# Altium PCB STM32_CAN_Telemetry_Node.PcbDoc
Units mm, origin at the board's own origin, x right, y up, seen from the top; angles counter-clockwise.
Board outline 90 x 67 mm, 2 copper layers (Top Layer, Bottom Layer); 72 components, 39 nets, 216 pads, 56 vias.
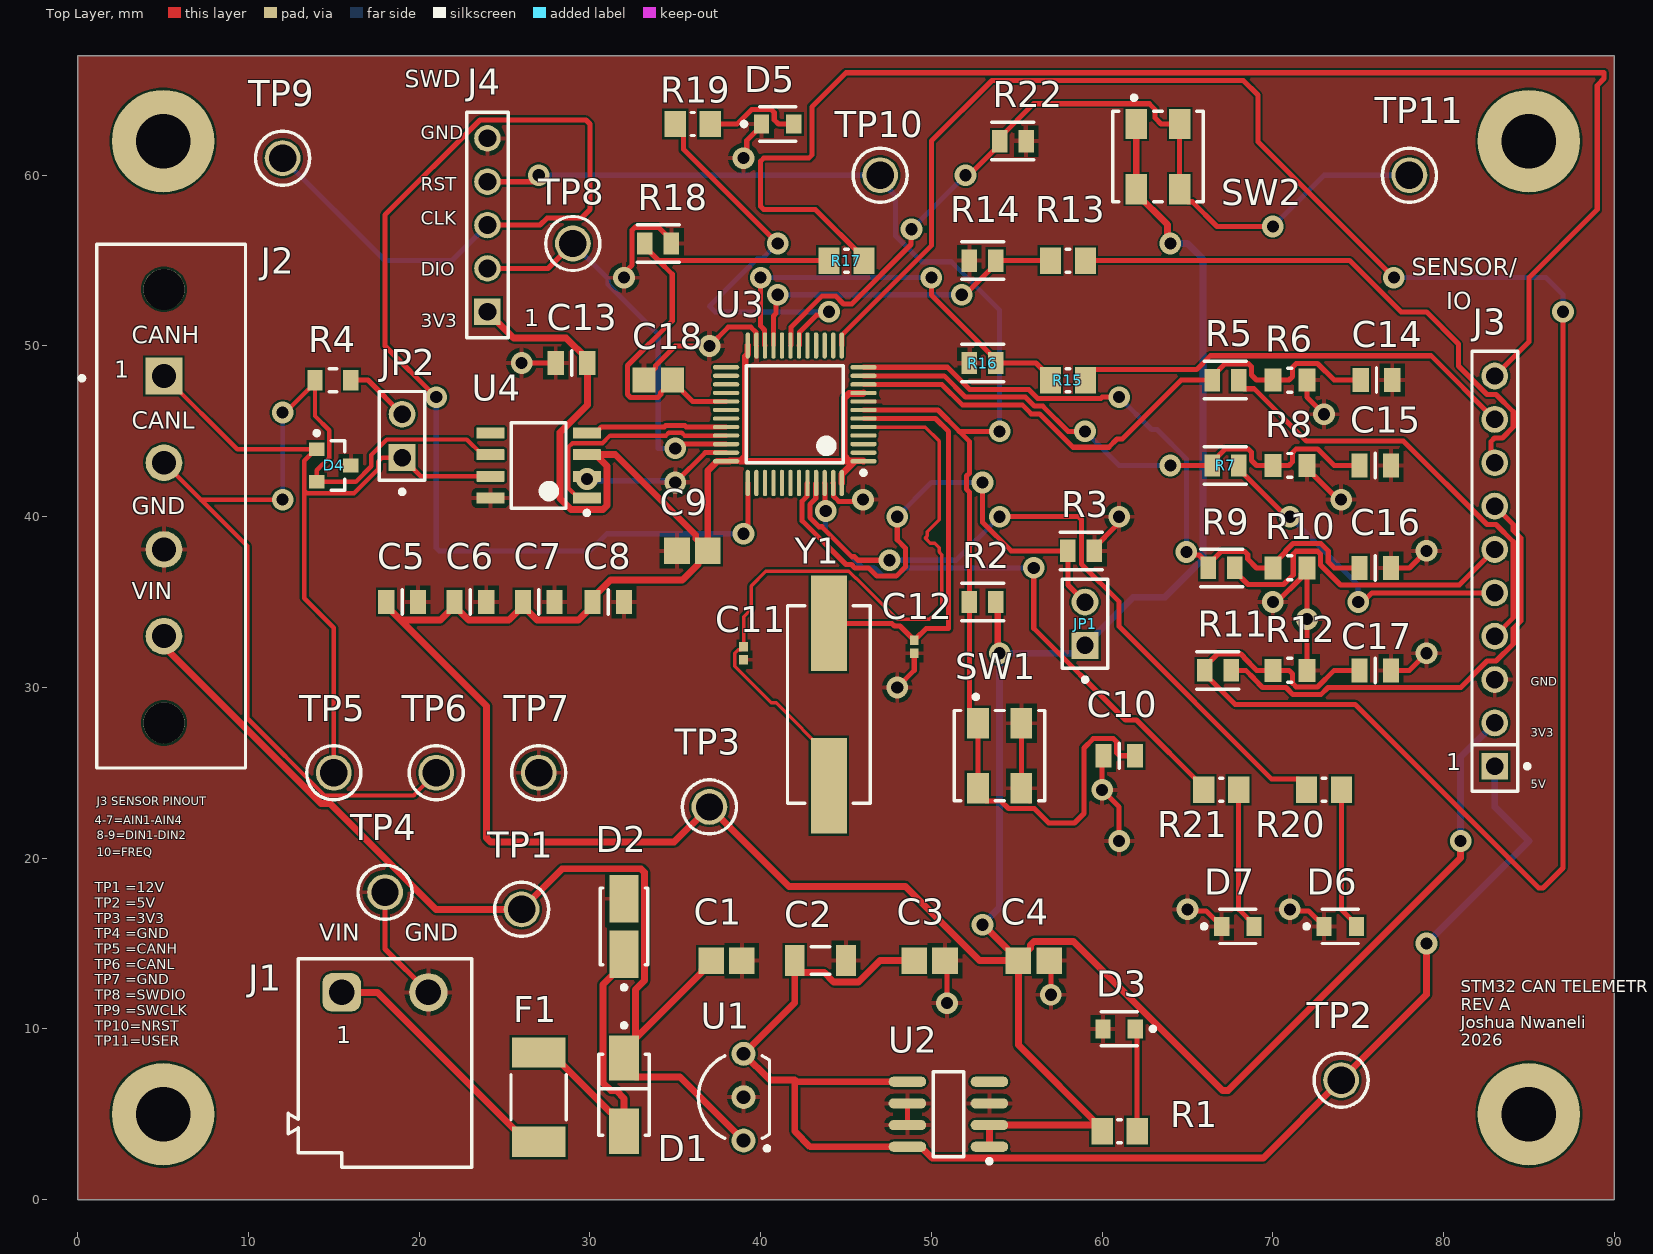
[diagram p0: Top Layer view]
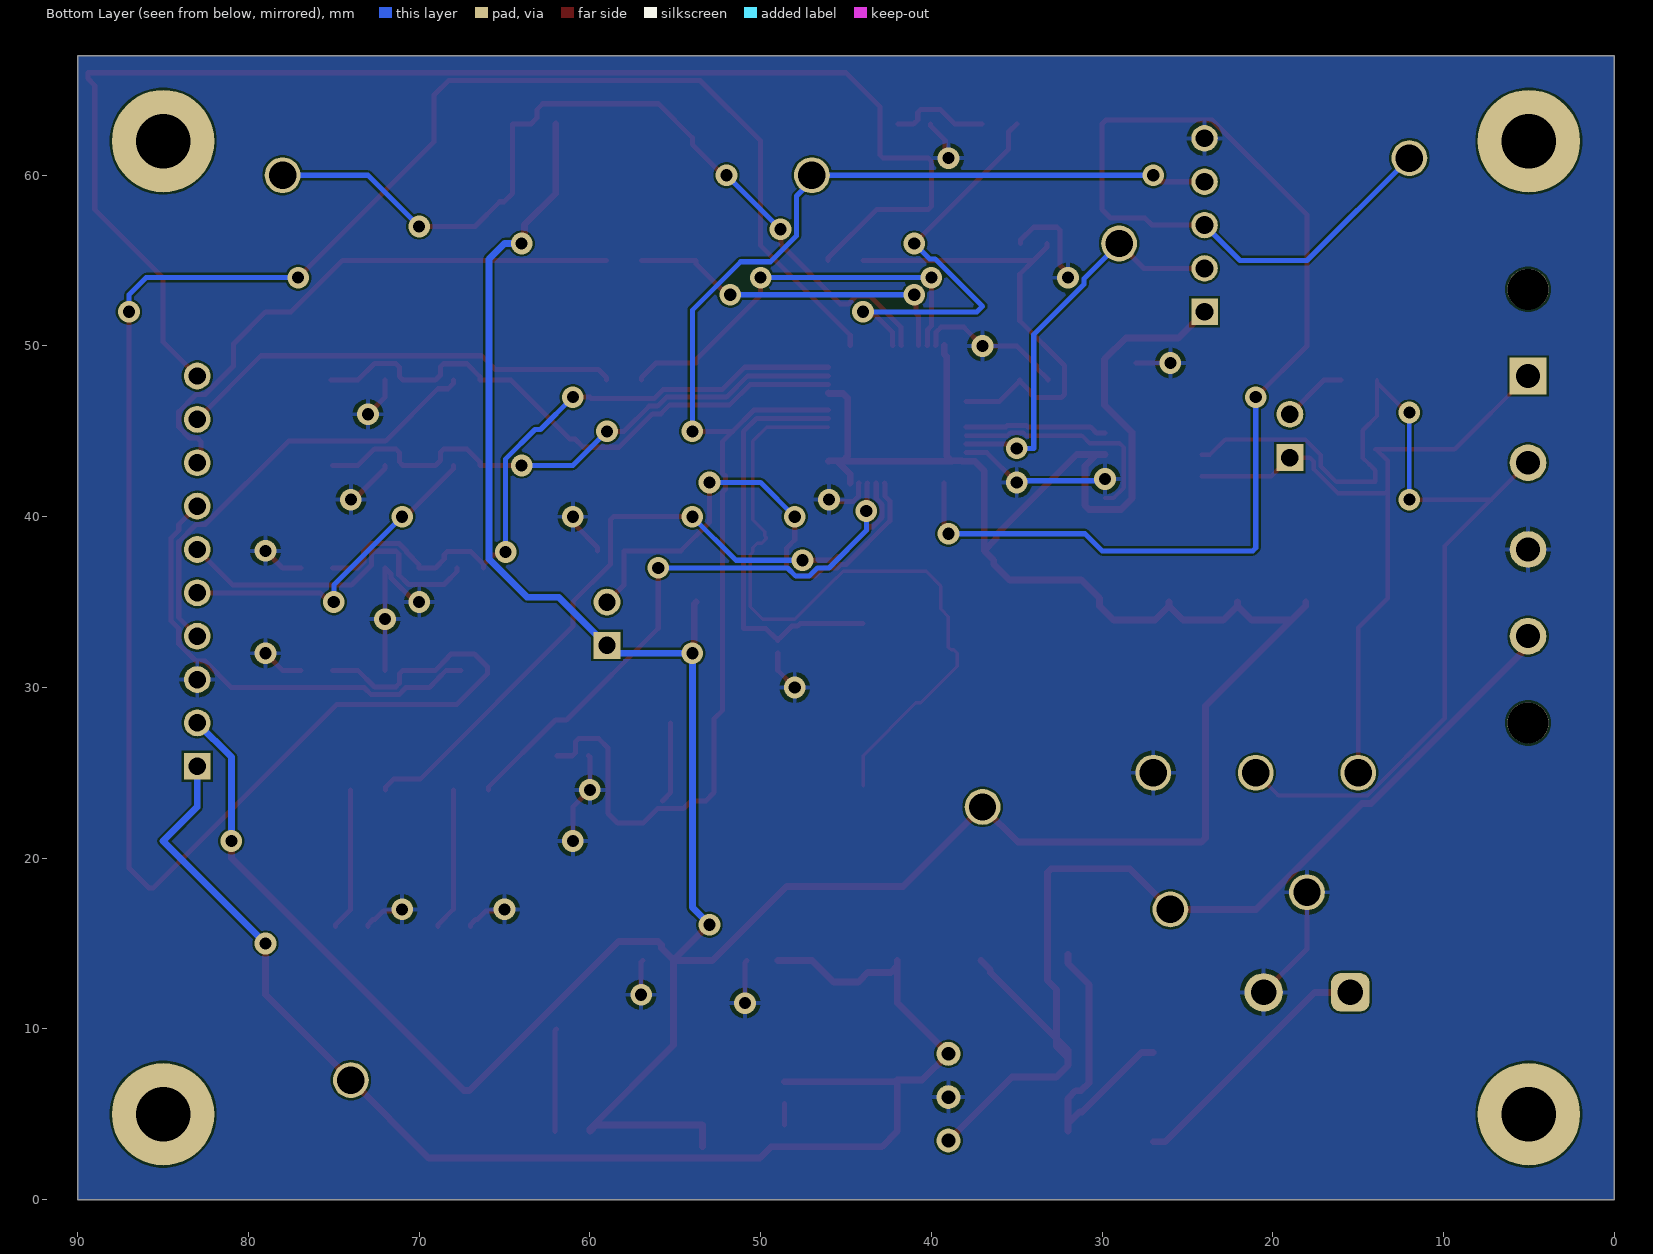
[diagram p1: Bottom Layer view, seen from below]
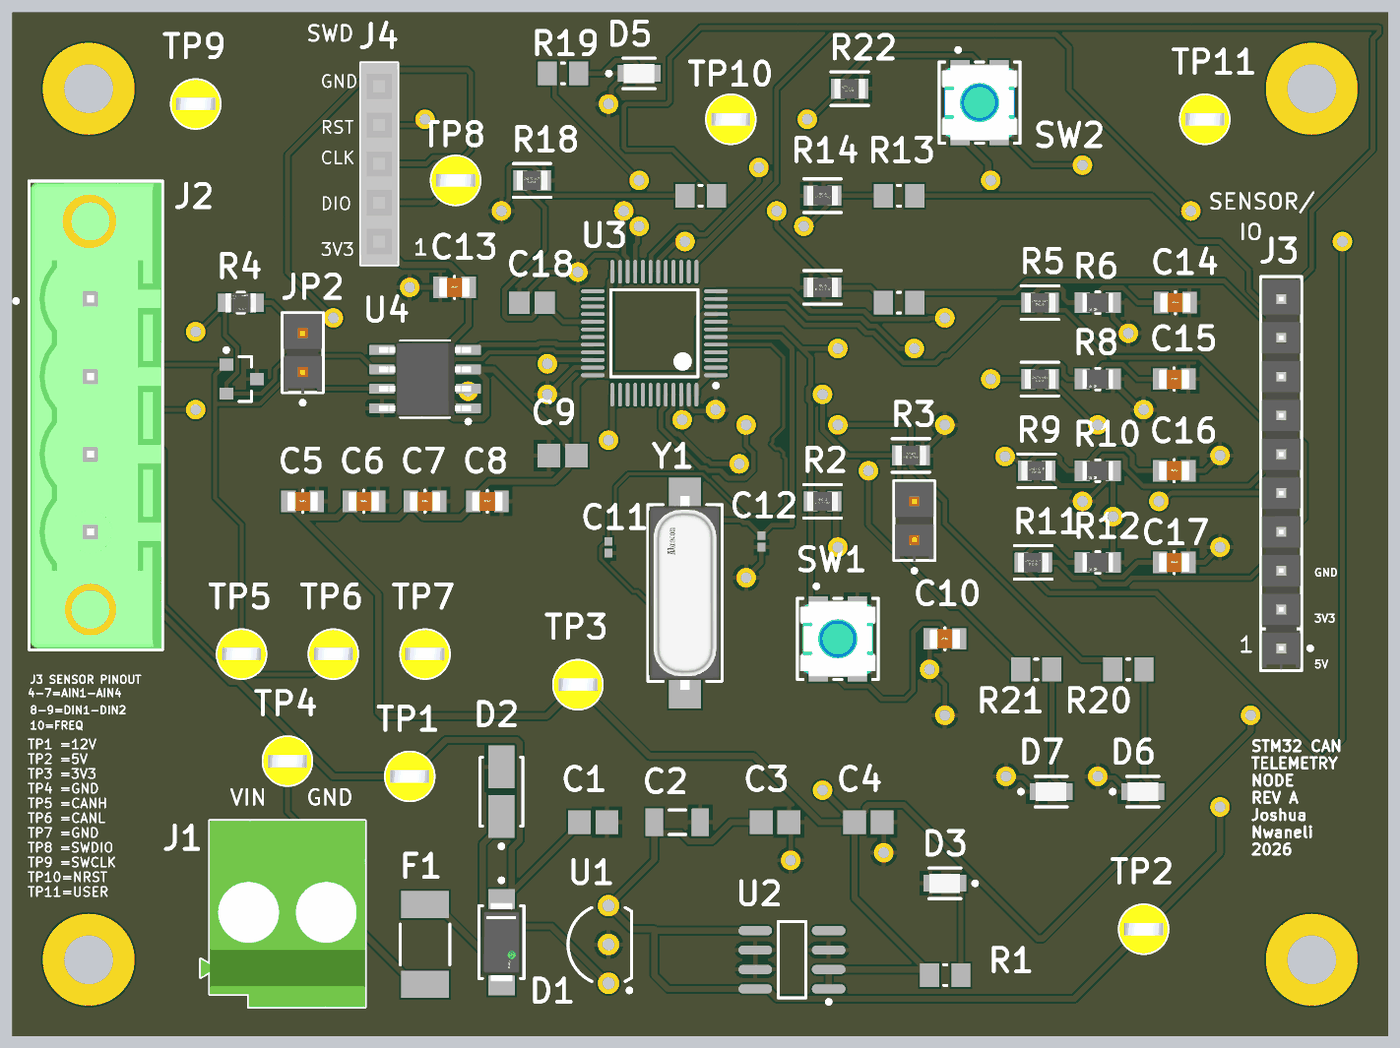
[diagram p2: 3D render of the assembled board from above, using the file's embedded part models]

## Layer stack, top to bottom
Top Solder: solder mask 0.0102, Solder Resist, Dk 3.5
Top Layer: signal copper 0.0356
Dielectric 1: dielectric 0.32, FR-4, Dk 4.8
Bottom Layer: signal copper 0.0356
Bottom Solder: solder mask 0.0102, Solder Resist, Dk 3.5

## Board outline
0,0 90,0 90,67 0,67

## Design rules (kind name [scope] priority, off if disabled: settings)
Clearance [All] p1: gap=0.125 ignorepadtopadclearanceinfootprint=FALSE
Height [All] p1: minheight=0 maxheight=40 prefheight=12.7
HoleSize [All] p1: absolutevalues=TRUE maxlimit=3.5 minlimit=0.025 maxpercent=80.000 minpercent=20.000
MinimumSolderMaskSliver [All] p1: minsoldermaskwidth=0.15
PolygonConnect [All] p1: connectstyle=Relief reliefconductorwidth=0.254 reliefentries=4 polygonreliefangle="90 Angle" airgapwidth=0.254
RoutingVias [All] p1: holewidth=0.711 width=1.27 viastyle="Through Hole" minholewidth=0.711 minwidth=1.27 maxholewidth=0.711 maxwidth=1.27
SilkToSolderMaskClearance [IsPad] p1: minsilkscreentomaskgap=0.15 clearancetoexposedcopper=TRUE
SolderMaskExpansion [All] p1: expansion=0 istentingtop=FALSE
SupplyNets "Schematic Supply Nets_3" [InNet('+3V3')] p1: voltage=0.000
SupplyNets "Schematic Supply Nets_2" [InNet('VIN_12V')] p2: voltage=0.000
SupplyNets "Schematic Supply Nets_1" [InNet('+5V')] p3: voltage=0.000
SupplyNets "Schematic Supply Nets" [InNet('GND')] p4: voltage=0.000
Width Width_Power [InNet('VIN_RAW') Or InNet('VIN_FUSED') Or InNet('VIN_12V') Or InNet('+5V') Or InNet('+3V3')] p1: maxlimit=0.8 minlimit=0.4 preferedwidth=0.6 minimp=50.000000 maximp=50.000000 favimp=50.000000 // Wider traces for power rails
Width [All] p2: maxlimit=0.3 minlimit=0.15 preferedwidth=0.2 minimp=50.000000 maximp=50.000000 favimp=50.000000
26 further rules are at their usual default settings.

## Components (designator, comment, footprint, x,y, rotation, side; value= is the part's Value field where it differs from the comment)
C1 "10uF" CAPC2013X140X50ML20T25 38,14 r180 top
C2 "22uF" CAPC1206(3216)190_N 43.5,14 r0 top
C3 "10uF" CAPC2013X140X50ML20T25 49.9,14 r180 top
C4 "10uF" CAPC2013X140X50ML20T25 56,14 r180 top
C5 "0.1uF" FP-CC0805-EB-MFG 19,35 r0 top
C6 "0.1uF" FP-CC0805-EB-MFG 23,35 r0 top
C7 "0.1uF" FP-CC0805-EB-MFG 27,35 r0 top
C8 "0.1uF" FP-CC0805-EB-MFG 31.075,35 r0 top
C9 "10uF" CAPC2013X140X50ML20T25 36,38 r0 top
C10 "0.1uF" FP-CC0805-EB-MFG 61,26 r0 top
C11 "27pF" CAPC0603X33X15ML03T05 39,32 r90 top
C12 "27pF" CAPC0603X33X15ML03T05 49,32.38 r90 top
C13 "0.1uF" FP-CC0805-EB-MFG 28.925,49 r0 top
C14 "0.1uF" FP-CC0805-EB-MFG 76.075,48 r0 top
C15 "0.1uF" FP-CC0805-EB-MFG 76,43 r0 top
C16 "0.1uF" FP-CC0805-EB-MFG 76,37 r0 top
C17 "0.1uF" FP-CC0805-EB-MFG 76,31 r0 top
C18 "1nF" CAPC2013X127X50NL20T25 34,48 r180 top
D1 "SS14 Schottky" FP-403AE-MFG 32,6.15 r90 top
D2 "SMAJ18A TVS" VISH-DO-214AC-2_M 32,16 r90 top
D3 "Power LED" FP-SML-LXT0805IW-TR-MFG 61,10 r180 top
D4 "CAN TVS Diode" ONSC-SOT-23-3-318-08_V 15,43 r0 top
D5 "Status LED" FP-SML-LXT0805IW-TR-MFG 41,63 r0 top
D6 "CAN Activity LED" FP-SML-LXT0805IW-TR-MFG 73.95,16 r0 top
D7 "Error LED" FP-SML-LXT0805IW-TR-MFG 67.95,16 r0 top
F1 "0.5A PTC Fuse" LFUS-1812L05030PR_V 27,6 r90 top
J1 "12V_INPUT" 691249510002 18,8 r0 top
J2 "CAN Connector" FP-1777099-MFG 5.466,40.62 r90 top
J3 "Sensor Header" FP-TSW-110-07-T-S-MFG 83,36.81 r90 top
J4 "SWD Header" SMTC-SSW-105-01-X-S 24,52 r90 top
JP1 "BOOT0 Jumper" FP-TSW-102-12-T-S-MFG 59,33.73 r90 top
JP2 "CAN TERM ENABLE" FP-TSW-102-12-T-S-MFG 19,44.73 r90 top
R1 "1K" RESC2013X50X30ML20T20 61.025,4 r0 top
R2 "10K" FP-CRGP0805-IPC_C 53,35 r0 top value=10KΩ
R3 "10K" FP-CRGP0805-IPC_C 58.776,38 r0 top value=10KΩ
R4 "120" FP-RT0805-MFG 14.95,48 r0 top value=120Ω
R5 "10K" FP-CRGP0805-IPC_C 67.224,48 r180 top value=10KΩ
R6 "20K" FP-RN732A-MFG 71,48 r180 top value=20KΩ
R7 "10K" FP-CRGP0805-IPC_C 67.224,43 r180 top value=10KΩ
R8 "20K" FP-RN732A-MFG 71,43 r180 top value=20KΩ
R9 "10K" FP-CRGP0805-IPC_C 67,37 r180 top value=10KΩ
R10 "20K" FP-RN732A-MFG 71,37 r180 top value=20KΩ
R11 "10K" FP-CRGP0805-IPC_C 66.776,31 r180 top value=10KΩ
R12 "20K" FP-RN732A-MFG 71,31 r180 top value=20KΩ
R13 "1K" RESC2013X50X30ML20T20 58,55 r180 top
R14 "10K" FP-CRGP0805-IPC_C 53,55 r0 top value=10KΩ
R15 "1K" RESC2013X50X30ML20T20 58,48 r180 top
R16 "10K" FP-CRGP0805-IPC_C 53,49 r0 top value=10KΩ
R17 "1K" RESC2013X50X30ML20T20 45.025,55 r180 top
R18 "10K" FP-CRGP0805-IPC_C 34,56 r180 top value=10KΩ
R19 "1K" RESC2013X50X30ML20T20 36.025,63 r0 top
R20 "1K" RESC2013X50X30ML20T20 73,24 r0 top
R21 "1K" RESC2013X50X30ML20T20 66.975,24 r0 top
R22 "10K" FP-CRGP0805-IPC_C 54.776,62 r180 top value=10KΩ
SW1 "RESET" FP-7914J-1-032-MFG 54,26 r0 top
SW2 "USER BUTTON" FP-7914J-1-032-MFG 63.27,61.095 r0 top
TP1 "12V" KSTN-5014_V 26,17 r0 top
TP2 "5V" KSTN-5014_V 74,7 r0 top
TP3 "3.3V" KSTN-5014_V 37,23 r0 top
TP4 "GND" KSTN-5014_V 18,18 r0 top
TP5 "CANH Test Point" KSTN-5014_V 15,25 r0 top
TP6 "CANL Test Point" KSTN-5014_V 21,25 r0 top
TP7 "GND Test Point" KSTN-5014_V 27,25 r0 top
TP8 "SWDIO Test Point" KSTN-5014_V 29,56 r0 top
TP9 "SWCLK Test Point" KSTN-5014_V 12,61 r0 top
TP10 "NRST Test Point" KSTN-5014_V 47,60 r0 top
TP11 "USER_BUTTON Test Point" KSTN-5014_V 78,60 r0 top
U1 "5V Regulator" LP3 39,6 r0 top
U2 "3.3V LDO" LT-S8-8_N 51,5 r180 top
U3 "STM32F103C8T6" STM-LQFP48_L 42,46 r180 top
U4 "CAN Transceiver" D0008A_M 27,43 r180 top
Y1 "8MHz Crystal" FP-ABLS-MFG 44,29 r90 top

## Footprints (in the part's own frame and the unit in brackets; to place one, negate y for a bottom-side part, rotate by r counter-clockwise, add the part's x,y. Pads: shape width x height; smd on the part's side, far side on the other; paste and mask are expansions set on the pad)
691249510002 [mm] "5.08mm Horizontal Cable Entry with Rising Cage Clamp, 02p"
  rrect50% 2.25x2.25 hole 1.5: 1(-2.54,4.14)
  round 2.25 hole 1.5: 2(2.54,4.14)
  silkscreen extent -5.68,-6.1 5.08,6.1, body extent -5.68,-6.1 5.08,6.1, height 31.6
CAPC0603X33X15ML03T05 [mm] "Chip Capacitor, 2-Leads, Body 0.60x0.30mm, IPC Low Density"
  rect 0.56x0.52 smd: 1(-0.38,0) 2(0.38,0)
  body extent -0.31,-0.17 0.32,0.16, height 0.33
CAPC1206(3216)190_N [mm] "Chip Capacitor, Body 3.2x1.6mm, Height 1.9mm, IPC Medium Density"
  rect 1.15x1.8 smd: 1(-1.5,0) 2(1.5,0)
  silkscreen extent -0.55,-0.8 0.55,0.8, body extent -1.7,-0.9 1.7,0.9, height 1.9
CAPC2013X127X50NL20T25 [mm] "Chip Capacitor, 2-Leads, Body 2.01x1.25mm, IPC Medium Density"
  rect 1.35x1.45 smd: 1(-0.825,0) 2(0.825,0)
  body extent -1.1,-0.72 1.11,0.72, height 1.27
CAPC2013X140X50ML20T25 [mm] "Chip Capacitor, 2-Leads, Body 2.00x1.25mm, IPC Low Density"
  rect 1.5x1.55 smd: 1(-0.9,0) 2(0.9,0)
  body extent -1.1,-0.72 1.1,0.72, height 1.4
D0008A_M [mm] "SOIC, 8-Leads, Body 5x4mm, Pitch 1.27mm, IPC Low Density"
  rrect15% 1.65x0.65 smd: 1(-2.825,1.905) 2(-2.825,0.635) 3(-2.825,-0.635) 4(-2.825,-1.905) 5(2.825,-1.905) 6(2.825,-0.635) 7(2.825,0.635) 8(2.825,1.905)
  silkscreen extent -2.95,-2.5 1.6,2.9, body extent -3,-2.45 3,2.45, height 1.63
FP-403AE-MFG [mm]
  rect 2.65x1.75 smd paste+0 mask+0: 1(-2.15,0) 2(2.15,0)
  silkscreen extent -2.37,-1.48 4.17,1.48, body extent -3.57,-1.58 3.57,1.58, height 0.25
FP-7914J-1-032-MFG [mm]
  rect 1.27x1.78 smd paste+0 mask+0: 1_1-(-1.27,1.905) 1_2+(1.27,1.905) 2_1-(-1.27,-1.905) 2_2+(1.27,-1.905)
  silkscreen extent -2.65,-2.65 2.65,3.57, body extent -2.75,-2.9 2.75,2.9, height 0.25
FP-1777099-MFG [mm]
  rect 2.15x2.15 hole 1.4 paste-2539.97 mask+0: 1(7.62,0.415)
  round 2.15 hole 1.4 paste-2539.97 mask+0: 2(2.54,0.415) 3(-2.54,0.415) 4(-7.62,0.415)
  round 2.4 hole 2.4 unplated paste-2539.97 mask+0: ""(-12.7,0.415) ""(12.7,0.415)
  silkscreen extent -15.34,-4.36 15.34,5.34, body extent -15.44,-4.46 15.44,4.46, height 0.25
FP-ABLS-MFG [mm]
  rect 5.6x2.1 smd paste+0 mask+0: 1(-4.75,0) 2(4.75,0)
  silkscreen extent -5.77,-2.42 5.77,2.42, body extent -7.65,-2.52 7.65,2.52, height 0.25
FP-CC0805-EB-MFG [mm]
  rect 0.95x1.4 smd paste+0 mask+0: 1(-0.925,0) 2(0.925,0)
  silkscreen extent 0,-0.72 0,0.72, body extent -1.6,-1.05 1.6,1.05, height 0.25
FP-CRGP0805-IPC_C [mm]
  rect 0.906x1.31 smd paste+0 mask+0: 1(-0.776,0) 2(0.776,0)
  silkscreen extent -1.23,-1.1 1.23,1.1, body extent -1.33,-0.8 1.33,0.8, height 0.25
FP-RN732A-MFG [mm]
  rect 1x1.35 smd paste+0 mask+0: 1(-1,0) 2(1,0)
  silkscreen extent -0.13,-0.7 0.13,0.7, body extent -1.6,-0.8 1.6,0.8, height 0.25
FP-RT0805-MFG [mm]
  rect 0.9x1.2 smd paste+0 mask+0: 1(-1.05,0) 2(1.05,0)
  silkscreen extent -0.23,-0.67 0.23,0.67, body extent -1.6,-0.77 1.6,0.77, height 0.25
FP-SML-LXT0805IW-TR-MFG [mm]
  rect 0.9x1.1 smd paste+0 mask+0: 1(-0.95,0) 2(0.95,0)
  silkscreen extent -2.1,-1 1.05,1, body extent -1.5,-0.8 1.5,0.8, height 0.25
FP-TSW-102-12-T-S-MFG [mm]
  rect 1.57x1.57 hole 1.02 paste-2539.97 mask+0: 1(-1.27,0)
  round 1.57 hole 1.02 paste-2539.97 mask+0: 2(1.27,0)
  silkscreen extent -3.4,-1.34 2.61,1.34, body extent -2.71,-1.44 2.71,1.44, height 0.25
FP-TSW-110-07-T-S-MFG [mm]
  rect 1.57x1.57 hole 1.02: 1(-11.43,0)
  round 1.57 hole 1.02: 2(-8.89,0) 3(-6.35,0) 4(-3.81,0) 5(-1.27,0) 6(1.27,0) 7(3.81,0) 8(6.35,0) 9(8.89,0) 10(11.43,0)
  silkscreen extent -12.89,-2.02 12.89,1.34, body extent -12.99,-1.44 12.99,1.44, height 0.25
KSTN-5014_V [mm] "Test Point, Dia 3.17mm"
  round 2.1 hole 1.6: 1(0,0)
  silkscreen extent -1.59,-1.58 1.59,1.58, body extent -1.59,-1.59 1.59,1.59, height 8.13
LFUS-1812L05030PR_V [mm] "SMD, 2-Leads, Body 4.55x3.24mm"
  rect 1.78x3.15 smd: 1(-2.615,0) 2(2.615,0)
  silkscreen extent -1.33,-1.62 1.33,1.62, body extent -2.27,-1.62 2.27,1.62, height 1
LP3 [mm] "TO, Flat Index; 3 In-Line, Formed Axial Leads; Body Dia. 4.8mm; Leads 0.56 x 0.41 mm (max)"
  round 1.4 hole 0.8: 1(0,-2.54) 2(0,0) 3(0,2.54)
  silkscreen extent -2.65,-3.13 1.52,2.41, body extent -2.65,-2.66 1.52,2.66, height 9.33
LT-S8-8_N [mm] "SOIC, 8-Leads, Body 4.9x3.9mm, Pitch 1.27mm, IPC Medium Density"
  oval 2.2x0.6 smd: 1(-2.4,1.905) 2(-2.4,0.635) 3(-2.4,-0.635) 4(-2.4,-1.905) 5(2.4,-1.905) 6(2.4,-0.635) 7(2.4,0.635) 8(2.4,1.905)
  silkscreen extent -2.53,-2.5 0.9,2.88, body extent -2,-2.5 2,2.5, height 1.76
ONSC-SOT-23-3-318-08_V [mm] "SOT23, 3-Leads, Body 2.92x1.3mm, Pitch 0.95mm"
  rect 0.9x0.8 smd: 1(-1,0.95) 2(-1,-0.95) 3(1,0)
  silkscreen extent -1.12,-1.46 0.65,2.02, body extent -0.65,-1.46 0.65,1.46, height 1.11
RESC2013X50X30ML20T20 [mm] "Chip Resistor, 2-Leads, Body 2.00x1.25mm, IPC Low Density"
  rect 1.25x1.55 smd: 1(-1.025,0) 2(1.025,0)
  silkscreen extent -0.1,-0.67 0.1,0.67, body extent -1.1,-0.72 1.1,0.72, height 0.5
SMTC-SSW-105-01-X-S [mm] "SQ Post Socket, 1x5 Pins, Vertical, 2.54mm Pitch, Female"
  rect 1.55x1.55 hole 1.04: 1(0,0)
  round 1.55 hole 1.04: 2(2.54,0) 3(5.08,0) 4(7.62,0) 5(10.16,0)
  silkscreen extent -1.53,-1.2 11.69,1.2, body extent -1.52,-1.21 11.68,1.21, height 8.51
STM-LQFP48_L [mm] "QFP, 48-Leads, Body 7x7mm, Pitch 0.5mm, IPC High Density"
  oval 1.55x0.25 smd: 1(-4.025,2.75) 2(-4.025,2.25) 3(-4.025,1.75) 4(-4.025,1.25) 5(-4.025,0.75) 6(-4.025,0.25) 7(-4.025,-0.25) 8(-4.025,-0.75) 9(-4.025,-1.25) 10(-4.025,-1.75) 11(-4.025,-2.25) 12(-4.025,-2.75) 25(4.025,-2.75) 26(4.025,-2.25) 27(4.025,-1.75) 28(4.025,-1.25) 29(4.025,-0.75) 30(4.025,-0.25) 31(4.025,0.25) 32(4.025,0.75) 33(4.025,1.25) 34(4.025,1.75) 35(4.025,2.25) 36(4.025,2.75)
  oval 0.25x1.55 smd: 13(-2.75,-4.025) 14(-2.25,-4.025) 15(-1.75,-4.025) 16(-1.25,-4.025) 17(-0.75,-4.025) 18(-0.25,-4.025) 19(0.25,-4.025) 20(0.75,-4.025) 21(1.25,-4.025) 22(1.75,-4.025) 23(2.25,-4.025) 24(2.75,-4.025) 37(2.75,4.025) 38(2.25,4.025) 39(1.75,4.025) 40(1.25,4.025) 41(0.75,4.025) 42(0.25,4.025) 43(-0.25,4.025) 44(-0.75,4.025) 45(-1.25,4.025) 46(-1.75,4.025) 47(-2.25,4.025) 48(-2.75,4.025)
  silkscreen extent -4.15,-2.85 2.85,3.55, body extent -3.5,-3.5 3.5,3.5, height 1.6
VISH-DO-214AC-2_M [mm] "DO-214AC, 2-Leads, Body 4.5x2.79mm, IPC Low Density"
  rect 2.8x1.7 smd: 1(-1.625,0) 2(1.625,0)
  silkscreen extent -3.7,-1.4 2.25,1.4, body extent -2.25,-1.39 2.25,1.4, height 2.29

## Part data
C1 C3 C4 C9: library part CMP-2007-04702-1, Manufacturer="AVX Interconnect / Elco", Part Number=0805ZC106KAT2A
C2: library part CMP-1037-04990-1, "CAP 22uF 10V ±20% 1206 (3216 Metric) Thickness 1.9mm SMD", Case-EIA=1206, Case-Metric=3216, Rated Voltage="10 V", Tolerance=Â±20%, Max Thickness="1.9 mm", Technology=SMT
C5 C6 C7 C8 C10 C13 C14 C15 C16 C17: library part CMP-00621-107850848-1, "CC0805KKX7RYBB104 Capacitor Ceramic 0.01uF 250V X7R 10% 0805 T/R", Capacitance=100nF, Case/Package=0805, Max Operating Temperature=125°C, Min Operating Temperature=-55°C, Tolerance=10%, Voltage Rating=250V, Height=1.45mm, Material=Ceramic, NexarPartId=107850848
C11 C12: library part CMP-2010-00173-1, Manufacturer="AVX Interconnect / Elco", Part Number=0201YA270JAT2A
C18: library part CMP-2007-04833-1, Manufacturer="AVX Interconnect / Elco", Part Number=08052C102MAT2A
D1: library part CMP-2000-04943-2, "DIODE SCHOTTKY 40V 1A SMA", Forward Current=1A, Manufacturer="ON Semiconductor", Manufacturer Part Number=SS14, Max Junction Temp=+125°C, Max Repetitive Reverse Voltage=40V, Max Surge Forward Current=40A, Package=403AE, Peak Reverse Current=0.2mA, Temperature="-65°C to +125°C", Temperature Range Low=-65°C, Automotive=No, Category=Diode, ComponentLink2Description=Datasheet, ComponentLink2URL=https://www.onsemi.com/pub/Collateral/SS19-D.PDF, Device Class L1="Discrete Semiconductors", Device Class L2=Diodes, Device Class L3="Schottky Diodes", Digikey Description="DIODE SCHOTTKY 40V 1A SMA", Height=2.5mm, Lead Free=Yes, Mouser Description="Schottky Diodes & Rectifiers SMA 40V 1.0A", Octopart=https://octopart.com/ss14-on+semiconductor-29205033, RoHS=TRUE, Standoff Height=0.05mm, Temperature Range High=+125°C
D2: library part CMP-0548-00222-2, "Transient Voltage Suppressor, 6.40 to 231 V, 18 V Stand-off Voltage, Uni-Directional, -55 to 155 degC, 2-pin DO-214AC, Pb-Free, Tape and Reel", Manufacturer="Vishay Semiconductor", Operating Junction and Storage Temperature Range="-55 to 150 degC", PartNumber=SMAJ18A-E3/61, ComponentLink1Description="Manufacturer URL", ComponentLink1URL=http://www.vishay.com/, ComponentLink2Description=Datasheet, ComponentLink2URL=http://www.vishay.com/docs/88390/smaj50a.pdf, ComponentLink3Description="Package Specification", ComponentLink3URL=http://www.vishay.com/docs/88390/smaj50a.pdf, DatasheetVersion=12/8/2013, ID (uA)=1, IFSM="40 A", Mounting Technology="Surface Mount", PackageDescription="2-Pin DO-214AC (SMA), Body 4.245 x 2.665 mm", PackageReference=DO-214AC-2, Packing="Tape and Reel", PPPM (W)="400, 300", RoHS=TRUE, VBR Uni-Directional (V)="6.4 to 231", VWM (V)=18
D3 D5 D6 D7: library part CMP-1724-00002-2, "LED RED DIFFUSED SMD", Case Code (Imperial)=0805, Case Code (Metric)=2012, Color=Red, Forward Current=20mA, Forward Voltage=2V, Lens Color=White, Max Operating Temperature=80°C, Min Operating Temperature=-25°C, Package Quantity=1, Approvals=UL, Case/Package=0805, Dominant Wavelength=635nm, Height=0.8mm, Illumination Color=Red, Lead Free="Lead Free", Length=2mm, Lens Style=Rectangular, Lens Transparency=Diffused, Luminous Intensity=11mcd, Mount="Surface Mount", Number of LEDs=1, Number of Pins=2, Packaging="Tape and Reel", REACH SVHC="No SVHC", Test Current=20mA, Viewing Angle=140°, Wavelength=635nm, Width=1.25mm
D4: library part CMP-1063-00169-1, "Dual-line ESD/transient protection for CANH and CANL", Manufacturer="On Semiconductor", PartNumber=SZNUP2105LT3G, C Max (pF)=30, ComponentLink1Description="Manufacturer URL", ComponentLink1URL=http://www.onsemi.com/, ComponentLink2Description=Datasheet, ComponentLink2URL=http://www.onsemi.cn/pub_link/Collateral/NUP2105L-D.PDF, ComponentLink3Description="Package Specification", ComponentLink3URL=http://www.onsemi.cn/pub_link/Collateral/318-08.PDF, DatasheetVersion="Rev. 5", Direction=Bidirectional, IR Max (uA)=0.1, Mounting Technology="Surface Mount", Number of Lines=2, PackageDescription="3-Pin Small Outline Transistor, Body 2.92 x 1.3 mm, Pitch 0.95 mm", PackageReference=SOT-23-3-318-08, PackageVersion="Rev. AP, 11/2009", Packing="Tape and Reel", PPK Max (W)=350, RoHS=Pb-Free, V(BR) Min (V)=26.2
F1: library part CMP-2000-05508-1, "PTC Resettable Fuse, 0.8 W, 30 V, -40 to 85 degC, 2-Pin SMD, RoHS, Tape and Reel", Current - Hold (Ih) (Max)=500mA, Current - Max=100A, Current - Trip (It)=1A, Manufacturer=Littelfuse-Inc., Package / Case=1812(4532Metric),Concave, Package Description="2-Pin Surface Mount Device, Body 4.55 x 3.24 mm", Package Reference=1812, Voltage - Max=30V, Category=CircuitProtection, Datasheet URL=http://www.littelfuse.com/~/media/electronics/datasheets/resettable_ptcs/littelfuse_ptc_1812l_datasheet.pdf.pdf, Datasheet Version=02/2016, Family=PTCResettableFuses, Manufacturer URL=http://www.littelfuse.com/, Mounting Technology=SurfaceMount, Packaging=Tape&Reel(TR), R Min/Max=0.150~1.000Ohm, Series=POLY-FUSE®,1812L, Time to Trip=0.15s
J1: library part CMP-03913-78871301-2, "Terminal Block, 5.08MM Pitch, Double Level Horizontal, 12-30 AWG, 2 Pin", Lead Pitch=5.08mm, Number of Pins=2, Packaging=Box
J2: library part CMP-09399-000012-1, "TERM BLOCK HDR 4POS VERT 5.08MM", Color=Green, Current=12A, Flammability Rating="UL94 V-0", Package Quantity=50, Voltage=300V, Voltage Rating=250V, Connector Type=Plug, Contact Material=Tin, Contact Plating=Tin, Current Rating=12A, Depth=8.3mm, Height=15.9mm, Housing Color=Green, Housing Material=Polybutylene, Lead Free="Lead Free", Length=30.48mm, Max Current Rating=12A, Mount="Through Hole", Number of Contacts=4, Number of Levels=1, Number of Positions=4, Number of Positions Per Level=4, Number of Rows=1, Orientation=Straight, Packaging=Bulk, Pitch=5.08mm, Series=MSTBV, Termination=Solder, Weight=5.467464oz, Width=30.48mm
J3: library part CMP-00575-00272505-1, "TSW-110-07-T-S TSW - Samtec 2.54mm Pin Header 10.92mm Overall Pin Length (07) (mcv)(TO22)", Color=Black, Manufacturer Lifecycle Status=PRODUCTION, Max Current Rating=7.6A, Max Operating Temperature=105°C, Max Voltage Rating (AC)=550V, Min Operating Temperature=-55°C, Connector Type="Male Pin", Contact Material="Nickel, Tin", Contact Mating Length=5.842mm, Contact Plating=Tin, Depth=2.54mm, Gender=Male, Height=8.71mm, Housing Color=Black, Housing Material=Polyester, Lead Free="Lead Free", Lead Pitch=2.54mm, Length=25.4mm, Lifecycle Status=Production, Mount="Through Hole", Number of Contacts=10, Number of Pins=10, Number of Positions=10, Number of Rows=1, Orientation=Straight, Packaging=Bulk, Pitch=2.54mm, Radiation Hardening=No, REACH SVHC="No SVHC", RoHS=Compliant, Termination=Solder, Width=2.54mm
J4: library part CMP-1023-00345-1, "SQ Post Socket, Through-hole, Vertical, -55 to 105 degC, 2.54mm Pitch, 5-Pin, Female, RoHS", Manufacturer=Samtec, PartNumber=SSW-105-01-T-S, Temperature Range="-55 to 105 degC", ComponentLink1Description="Manufacturer URL", ComponentLink1URL=http://www.samtec.com, ComponentLink2Description=Datasheet, ComponentLink2URL=http://www.samtec.com/documents/webfiles/pdf/SSW_TH.PDF, ComponentLink3Description="Package Specification", ComponentLink3URL=http://www.samtec.com/documents/webfiles/cpdf/SSW-1XX-XX-XXX-X-XX-XXX-XX-MKT.pdf, DatasheetVersion=F-214, Mounting Technology=Through-hole, Orientation=Vertical, PackageDescription="Assembly, Socket Strip .016 X .031 Tail", PackageReference=SSW-105-01-X-S, PackageVersion="CA, 6/1987", Pitch="2.54 mm", RoHS=True
JP1: library part CMP-02766-001444-1, "CONN HEADER VERT 2POS 2.54MM", Contact Material=Bronze, Contact Plating=Tin, Gender=Male, Mount="Through Hole", Number of Contacts=2, Number of Rows=1, Packaging=Bulk, Pitch=2.54mm, Radiation Hardening=No, REACH SVHC="No SVHC", RoHS Compliant=Yes, Termination=Solder
JP2: library part CMP-02766-001444-1, "Jumper to enable optional 120R CAN bus termination", Contact Material=Bronze, Contact Plating=Tin, Gender=Male, Mount="Through Hole", Number of Contacts=2, Number of Rows=1, Packaging=Bulk, Pitch=2.54mm, Radiation Hardening=No, REACH SVHC="No SVHC", RoHS Compliant=Yes, Termination=Solder
R1 R13 R15 R17 R19 R20 R21: library part CMP-2001-04268-1, Manufacturer="Vishay Dale", Part Number=CRCW08051K00FKTC
R2 R3 R5 R7 R9 R11 R14 R16 R18 R22: library part CMP-03211-006861-1, "CRGP 0805 10K 1%", Ambient Temperature Range High=+70°C, Manufacturer=TE, Manufacturer Part Number=CRGP0805F10K, Package=CRGP0805, Power Rating=0.33W, Resistance=10KΩ, Temperature="-55°C to +155°C", Temperature Coefficient=±100ppm/°C, Temperature Range High=+155°C, Temperature Range Low=-55°C, Tolerance=0.01, Voltage Rating=150V, Automotive=No, Category=Res, ComponentLink2Description=Datasheet, ComponentLink2URL=https://www.mouser.com/datasheet/2/418/NG_DS_9-1773463-9_A-1358566.pdf, Composition="Thick Film", Device Class L1="Passive Components", Device Class L2=Resistors, Device Class L3="Chip SMD Resistors", Digikey Description="CRGP 0805 10K 1%", Height=0.65mm, Ipc Land Pattern Name=RESC200125X55, Lead Free=Yes, Octopart=https://octopart.com/crgp0805f10k-te+connectivity-91018782, RoHS=TRUE, Series=CRGP
R4: library part CMP-03412-026588-1, "RES SMD 120 OHM 0.5% 1/8W 0805", Manufacturer=Yageo, Manufacturer Part Number=RT0805DRD07120RL, Package=RT0805, Power Rating=0.125W, Resistance=120Ω, Temperature="-55°C to +155°C", Temperature Coefficient="25 ppm/°C", Temperature Range High=+155°C, Temperature Range Low=-55°C, Tolerance=0.01, Voltage Rating=150V, Automotive=No, Category=Res, ComponentLink2Description=Datasheet, ComponentLink2URL=http://www.yageo.com/documents/recent/PYu-RT_1-to-0.01_RoHS_L_9.pdf, Composition="Thin Film", Device Class L1="Passive Components", Device Class L2=Resistors, Device Class L3="Chip SMD Resistors", Digikey Description="RES SMD 120 OHM 0.5% 1/8W 0805", Footprint Url=http://www.yageo.com/exep/pages/download/literatures/PYu-R_Mount_10.pdf, Height=0.6mm, Ipc Land Pattern Name=RESC200125X50, Lead Free=Yes, Octopart=https://octopart.com/rt0805drd07120rl-yageo-1204488, RoHS=TRUE, Series=RT
R6 R8 R10 R12: library part CMP-03211-001671-1, "SMD Chip Resistor, Thin Film, 20KΩ, 100 V, 0805 [2012 Metric], 100 mW, 0.1%, RN73 Series", Manufacturer="TE Connectivity", Manufacturer Part Number=RN73C2A20KBTDF, Package=RN732A, Power Rating=0.1W, Resistance=20KΩ, Temperature="-55°C to 155°C", Temperature Coefficient=10ppm/°C, Temperature Range High=155°C, Temperature Range Low=-55°C, Tolerance=0.1%, Voltage Rating=100V, Automotive=No, Category=Res, ComponentLink2Description=Datasheet, ComponentLink2URL=https://www.te.com/commerce/DocumentDelivery/DDEController?Action=showdoc&DocId=Data+Sheet%7F1773270%7FP%7Fpdf%7FEnglish%7FENG_DS_1773270_P.pdf%7F1676162-2, Composition="Thin Film", Device Class L1="Passive Components", Device Class L2=Resistors, Device Class L3="Chip SMD Resistors", Height=0.65mm, Ipc Land Pattern Name=RESC200125X55, Lead Free=Yes, Octopart=https://octopart.com/rn73c2a20kbtdf-te+connectivity-21411984, octopart_url=https://octopart.com/rn73c2a20kbtdf-te+connectivity-21411984, Packaging="1000 Reel", RoHS=TRUE, Series=RN73
SW1: library part CMP-07427-000007-1, "Normally open reset pushbutton for STM32 NRST", Case/Package=SMD/SMT, Current Rating=100mA, Max Operating Temperature=125°C, Min Operating Temperature=-55°C, Operating Force=300gf, Package Quantity=50, Voltage Rating (DC)=16V, Actuator Material=Rubber, Actuator Type=Standard, Contact Material=Gold, Contact Plating=Silver, Depth=5mm, Illumination Type=Non-Illuminated, Length=5mm, Max Current Rating=100mA, Mechanical Life=100000Cycles, Mount="Surface Mount", Orientation=Straight, Packaging=Rail/Tube, RoHS Compliant=Yes, Series=7914, Switch Function=Off-Mom, Termination=J-Hook, Throw Configuration=SPST
SW2: library part CMP-07427-000007-1, "Normally open user pushbutton input", Case/Package=SMD/SMT, Current Rating=100mA, Max Operating Temperature=125°C, Min Operating Temperature=-55°C, Operating Force=300gf, Package Quantity=50, Voltage Rating (DC)=16V, Actuator Material=Rubber, Actuator Type=Standard, Contact Material=Gold, Contact Plating=Silver, Depth=5mm, Illumination Type=Non-Illuminated, Length=5mm, Max Current Rating=100mA, Mechanical Life=100000Cycles, Mount="Surface Mount", Orientation=Straight, Packaging=Rail/Tube, RoHS Compliant=Yes, Series=7914, Switch Function=Off-Mom, Termination=J-Hook, Throw Configuration=SPST
TP1: library part CMP-1672-00006-4, "12V Test Point", Colour=Yellow, Manufacturer=Keystone, Package Quantity=100, ComponentLink1Description="Manufacturer URL", ComponentLink1URL=http://www.keyelco.com/, ComponentLink2Description=Datasheet, ComponentLink2URL=http://www.keyelco.com/product-pdf.cfm?p=1323, Contact Material=Bronze, Contact Plating=Silver, DatasheetVersion="Rev. F, 12/2013", Height="8.12 mm", Mount="Through Hole", Mounting Technology="Through Hole", PackageDescription="1-Pin Through Hole Device, Dia 3.17 mm", PackageReference=5014, Packaging=Bulk, REACH SVHC="No SVHC", RoHSCompliant=true
TP2: library part CMP-1672-00006-4, "5V Test Point", Colour=Yellow, Manufacturer=Keystone, Package Quantity=100, ComponentLink1Description="Manufacturer URL", ComponentLink1URL=http://www.keyelco.com/, ComponentLink2Description=Datasheet, ComponentLink2URL=http://www.keyelco.com/product-pdf.cfm?p=1323, Contact Material=Bronze, Contact Plating=Silver, DatasheetVersion="Rev. F, 12/2013", Height="8.12 mm", Mount="Through Hole", Mounting Technology="Through Hole", PackageDescription="1-Pin Through Hole Device, Dia 3.17 mm", PackageReference=5014, Packaging=Bulk, REACH SVHC="No SVHC", RoHSCompliant=true
TP3: library part CMP-1672-00006-4, "3.3V Test Point", Colour=Yellow, Manufacturer=Keystone, Package Quantity=100, ComponentLink1Description="Manufacturer URL", ComponentLink1URL=http://www.keyelco.com/, ComponentLink2Description=Datasheet, ComponentLink2URL=http://www.keyelco.com/product-pdf.cfm?p=1323, Contact Material=Bronze, Contact Plating=Silver, DatasheetVersion="Rev. F, 12/2013", Height="8.12 mm", Mount="Through Hole", Mounting Technology="Through Hole", PackageDescription="1-Pin Through Hole Device, Dia 3.17 mm", PackageReference=5014, Packaging=Bulk, REACH SVHC="No SVHC", RoHSCompliant=true
TP4: library part CMP-1672-00006-4, "Ground Test Point", Colour=Yellow, Manufacturer=Keystone, Package Quantity=100, ComponentLink1Description="Manufacturer URL", ComponentLink1URL=http://www.keyelco.com/, ComponentLink2Description=Datasheet, ComponentLink2URL=http://www.keyelco.com/product-pdf.cfm?p=1323, Contact Material=Bronze, Contact Plating=Silver, DatasheetVersion="Rev. F, 12/2013", Height="8.12 mm", Mount="Through Hole", Mounting Technology="Through Hole", PackageDescription="1-Pin Through Hole Device, Dia 3.17 mm", PackageReference=5014, Packaging=Bulk, REACH SVHC="No SVHC", RoHSCompliant=true
TP5 TP6 TP7 TP8 TP9 TP10 TP11: library part CMP-1672-00006-4, "Test Point, Yellow, Through Hole, RoHS, Bulk", Colour=Yellow, Manufacturer=Keystone, Package Quantity=100, ComponentLink1Description="Manufacturer URL", ComponentLink1URL=http://www.keyelco.com/, ComponentLink2Description=Datasheet, ComponentLink2URL=http://www.keyelco.com/product-pdf.cfm?p=1323, Contact Material=Bronze, Contact Plating=Silver, DatasheetVersion="Rev. F, 12/2013", Height="8.12 mm", Mount="Through Hole", Mounting Technology="Through Hole", PackageDescription="1-Pin Through Hole Device, Dia 3.17 mm", PackageReference=5014, Packaging=Bulk, REACH SVHC="No SVHC", RoHSCompliant=true
U1: library part CMP-0324-00078-1, "Regulates protected 12V input down to 5V", Manufacturer="Texas Instruments", PartNumber=UA78M05IKCSE3, Code_JEDEC=TO-226-AA, ComponentLink1Description=Datasheet, ComponentLink1URL=http://www.ti.com/general/docs/lit/getliterature.tsp?genericPartNumber=UA78M05&fileType=pdf, ComponentLink2Description="URL Link1", ComponentLink2URL="Samples URL:http://www.ti.com/product/ua78m05#samples", DatasheetVersion=SLVS059Q, Eco-Plan="Pb-Free (RoHS)", Iout(Max)(A)=0.5, Iq(Typ)(mA)=6, Mounting Technology="Through Hole", PackageDescription="Plastic Cylindrical Package, Formed Lead Option (TO-92)", PackageReference=LP3, PackageVersion="revC, Oct-2001", Vin(Max)(V)=25, Vin(Min)(V)=7, Vout(Max)(V)=5, Vout(Min)(V)=5
U2: library part CMP-0476-01566-1, "500 mA, Low Noise, LDO Micropower Regulator, 1.8 to 20 V Vin, 3.3 V Vout, 8-pin SOIC (S8-8), -40 to 125 degC, Pb-Free", Dropout Voltage(V)=0.3, Manufacturer="Linear Technology", Output Voltage="3.3 V", PartNumber=LT1763IS8-3.3#PBF, Shutdown Current(uA)=1, ComponentLink1Description="Manufacturer URL", ComponentLink1URL=http://www.linear.com/, ComponentLink2Description=Datasheet, ComponentLink2URL=http://cds.linear.com/docs/en/datasheet/1763fg.pdf, ComponentLink3Description="Package Specification", ComponentLink3URL=http://cds.linear.com/docs/en/packaging/05081610_G_SO8.pdf, DatasheetVersion="Rev. G", Discrete Pass Element=no, Iout(mA)=500, Isupply(mA)=0.03, Mounting Technology="Surface Mount", Noise(uV)=20, Number of Outputs=1, PackageDescription="8-Pin Plastic Small Outline (Narrow .150 Inch), Body 4.9 x 3.9 mm, Pitch 1.27 mm", PackageReference=S8-8, PackageVersion="Rev. G, 03/2012", PSRR(dB)=65, RoHS=TRUE, Vin Max(V)=20, Vin Min(V)=1.8
U3: library part CMP-0237-00215-3, "ARM Cortex-M3 32-bit MCU, 64 KB Flash, 20 KB Internal RAM, 37 I/Os, 48-pin LQFP, -40 to 85 degC, Tray", I/Os (High Current)=37, Operating Frequency(F) (Processor speed) (MHz)=72, Supply Voltage(Vcc) min (V)=2, A/D Converter="2x12-bit (10 Channel)", ComponentLink1Description="Manufacturer URL", ComponentLink1URL=http://www.st.com/web/en/home.html, ComponentLink2Description=Datasheet, ComponentLink2URL=http://www.st.com/st-web-ui/static/active/en/resource/technical/document/datasheet/CD00161566.pdf, ComponentLink3Description="Package Specification", ComponentLink3URL=http://www.st.com/st-web-ui/static/active/en/resource/technical/document/datasheet/DM00058181.pdf, Core="ARM Cortex-M3", DatasheetVersion="Rev. 16", FLASH Size (Prog) (kB)=64, Internal RAM Size (kB)=20, Mounting Technology="Surface Mount", PackageDescription="48-Pin Low Profile Quad Flat Package, 7 x 7 mm Body, 0.5 mm Pitch", PackageReference=LQFP48, PackageVersion="Rev. 6, 06/2013", Packing=Tray, PartNumber=STM32F103C8T6
U4: library part CMP-0315-00046-3, "CAN Bus Transceiver, 3.3 V, -40 to 85 degC, 8-Pin SOIC (D), Green (RoHS & no Sb/Br), Tube", Generic Part Number=SN65HVD230, PartNumber=SN65HVD230D, Supply Voltage Max="3.6 V", Supply Voltage Min="3 V", Temperature Max="85 degC", Temperature Min="-40 degC", ComponentLink1Description="Manufacturer URL", ComponentLink1URL=http://www.ti.com/, ComponentLink2Description=Datasheet, ComponentLink2URL="http://www.ti.com/general/docs/lit/getliterature.tsp?genericGeneric Part Number=SN65HVD230&fileType=pdf", DatasheetVersion=SLOS346N, Mounting Technology="Surface Mount", PackageDescription="8-Pin Plastic Small Outline, Body 4.9 x 3.9 mm, Pitch 1.27 mm", Packing=Tube, RoHS=TRUE
Y1: library part CMP-27762-009874-1, "CRYSTAL 8.0000MHZ 18PF SMD", Case/Package=SMD/SMT, ESR (Equivalent Series Resistance)=80R, Frequency=8MHz, Frequency Stability=50ppm, Frequency Tolerance=20ppm, Load Capacitance=18pF, Max Operating Temperature=70°C, Min Operating Temperature=-20°C, Operating Frequency="8 MHz", Package Quantity=1000, Accuracy=20ppm, Contact Plating=Tin, Depth=4.7mm, Height=0.165inch, Lead Free="Lead Free", Length=11.4mm, Mount="Surface Mount", Number of Pins=2, Packaging="Tape and Reel", Radiation Hardening=No, REACH SVHC="No SVHC", Series=ABLS, Series Resistance=80R, Termination=SMD/SMT, Tolerance=20ppm, Width=4.7mm

## Free pads (board coordinates)
  round 6 hole 3.2 unplated: 1(5,5) 2(85,5) 3(5,62) 4(85,62)

## Via types
v1: diameter 1.27, hole 0.711, Top Layer to Bottom Layer, 56 vias

## Nets (pads, with @x,y where several pads share a name; then routed paths per layer and width w, separated by ;. In a path a pad name is that pad's centre, name@x,y a point inside that pad or via, vN(x,y) a via of type N, cw(c..) or ccw(c..) an arc to the next point about the centre after c; other vN are vias at no path point)
+3V3: C4.2 C5.1 C6.1 C7.1 C8.1 C9.2 C13.2 J3.2 J4.1 JP1.1 R1.1 R2.2 SW2.1_1- SW2.2_1- TP3.1 U2.1 U2.2 U3.1 U3.9 U3.24 U3.36 U3.48 U4.3 | length 262.1
  Top Layer w0.4: C5.1 18.075,34.775 18.9,33.95 ; C6.1 C6.1@22.075,34.775 ; J4.1 25.538,50.463 28.613,50.463 29.85,49.225 C13.2 29.85,46.546 28.246,44.942 28.246,41.058 28.884,40.42 30.766,40.42 31,40.654 31,42.96 U4.3@30.325,43.635 ; C7.1 C7.1@26.075,34.775 ; U4.3 U4.3@30.325,43.635 ; 38.822,43.25 45.178,43.25 ; U3.24 39.25,49.525 39.1,49.375 39.1,43.553 38.822,43.275 38.207,43.275 38.182,43.25 37.475,43.25 36.9,42.675 C9.2@36.9,38.025 ; U3.48 44.75,42.475 U3.1@45.525,43.25 ; U3.1 46,43.275 45.525,43.275 45.178,43.275 44.9,43.553 44.9,46.947 45.178,47.225 46,47.225 U3.9 ; v1(53,16.1) 53.025,16.1 C4.2@55.1,14.025 ; U2.1 U2.2 59.635,4.365 R1.1 60,4.15 55.1,9.05 C4.2 ; R2.2 53.888,34.888 53.888,32.112 v1(54,32) ; SW2.1_1- SW2.2_1- 62,58.935 63.834,57.101 63.834,56.166 v1(64,56) ; v1(81,21) 81,20 67.388,6.388 67.057,6.388 58.32,15.125 56.005,15.125 55.8,14.92 55.8,14.725 C4.2@55.1,14.025 ; 18.9,33.95 21.25,33.95 C6.1@22.075,34.775 ; 18.9,33.95 23.937,28.913 23.937,21.172 24.172,20.937 34.937,20.937 TP3.1 41.663,18.337 48.483,18.337 52.82,14 C4.2 ; C6.1@22.075,34.775 22.9,33.95 25.25,33.95 C7.1@26.075,34.775 ; C7.1@26.075,34.775 26.9,33.95 29.325,33.95 30.15,34.775 C8.1 30.15,35.225 31.215,36.29 35.41,36.29 36.35,37.23 36.35,37.45 C9.2 C9.2@36.9,38.025 ; U4.3@30.325,43.635 31.485,43.635 36.2,38.92 36.2,38.725 C9.2@36.9,38.025 ; C4.2 C4.2@55.1,14.025
  Bottom Layer w0.4: v1(53,16.1) 54,17.1 v1(54,32) 58.54,32 JP1.1 61.826,35.286 63.679,35.286 65.92,37.527 65.92,55.08 65,56 v1(64,56) ; v1(81,21) 81,25.92 J3.2
+5V: C2.1 C3.2 J3.1 TP2.1 U1.3 U2.5 U2.8 | length 86.2
  Top Layer w0.4: C2.1 C2.1@42,13.675 ; U2.5 42.095,6.905 42,7 ; C3.2 46.99,14 45.74,12.75 44.28,12.75 43.73,13.3 42.375,13.3 C2.1@42,13.675 ; v1(79,15) 79,12 TP2.1 69.445,2.445 50.05,2.445 49.4,3.095 U2.8 42.905,3.095 42,4 42,7 ; 42,7 40.54,7 U1.3 42,11.54 C2.1@42,13.675
  Bottom Layer w0.4: v1(79,15) 85,21 83,23 J3.1
ADC_IN0: C14.1 R5.2 R6.2 U3.10 | length 34.6
  Top Layer w0.3: U3.10 50.614,47.75 51.814,46.55 55.328,46.55 55.853,46.025 56.339,46.025 58.299,44.065 60.387,44.065 60.872,44.55 61.186,44.55 64.636,48 R5.2 66.448,48.202 67.201,48.955 68.577,48.955 68.753,48.779 68.753,48.297 69.05,48 R6.2 70.95,48 71.163,48.213 71.163,48.762 71.376,48.975 72.624,48.975 73.599,48 C14.1
ADC_IN1: C15.1 R7.2 R8.2 U3.11 | length 33.5
  Top Layer w0.3: U3.11 50.75,48.25 52,47 55.514,47 56.039,46.475 56.525,46.475 58,45 v1(59,45) ; v1(64,43) R7.2 66.448,43.202 67.201,43.955 68.577,43.955 68.753,43.779 68.753,43.297 69.05,43 R8.2 70.95,43 71.163,43.213 71.163,43.762 71.376,43.975 72.624,43.975 73.599,43 C15.1
  Bottom Layer w0.3: v1(59,45) 61,43 v1(64,43)
ADC_IN2: C16.1 R9.2 R10.2 U3.12 | length 39.8
  Top Layer w0.3: U3.12 50.942,48.75 52.242,47.45 55.701,47.45 56.226,46.925 59.925,46.925 60,47 v1(61,47) ; v1(64.935,37.935) 65.121,37.749 65.676,37.749 R9.2@66.224,37.202 ; R9.2 R9.2@66.224,37.202 ; C16.1 73.599,37 73.25,37.349 73.25,37.986 72.811,38.425 71.189,38.425 70.75,37.986 70.75,37.925 70,37.175 R10.2 69.05,37 68.529,37.521 68.529,37.779 68.353,37.955 66.977,37.955 R9.2@66.224,37.202
  Bottom Layer w0.3: v1(61,47) 62.899,45.101 63.221,45.101 64.935,43.387 v1(64.935,37.935)
ADC_IN3: C17.1 R11.2 R12.2 U3.13 | length 131
  Top Layer w0.3: U3.13 44.75,50.625 50,55.875 50,62 53.55,65.55 68.274,65.55 69.133,64.692 69.133,61.958 v1(77.091,54) ; C17.1 73.599,31 72.624,30.025 71.376,30.025 71.163,30.238 71.163,30.787 70.95,31 R12.2 69.05,31 68.305,31.745 68.305,31.779 68.129,31.955 66.753,31.955 66,31.202 R11.2 66,30.798 67.798,29 74.824,29 85.576,18.249 85.824,18.249 87,19.424 v1(87,52)
  Bottom Layer w0.3: v1(77.091,54) 86,54 87,53 v1(87,52)
AIN1: J3.4 R5.1 | length 26.1
  Top Layer w0.3: R5.1 68,47.798 68.303,47.495 68.906,47.495 71.976,44.425 77.661,44.425 82.551,39.535 83.079,39.535 84.085,38.529 84.085,34.085 J3.4
AIN2: J3.5 R7.1 | length 19.2
  Top Layer w0.3: R7.1 68,42.798 70.798,40 v1(71,40) ; v1(75,35) 75.262,35 75.802,35.54 J3.5
  Bottom Layer w0.3: v1(71,40) 75,36 v1(75,35)
AIN3: J3.6 R9.1 | length 19.3
  Top Layer w0.3: R9.1 67.776,36.798 68.549,36.025 70.624,36.025 71.2,36.601 71.2,37.799 71.376,37.975 72.624,37.975 72.8,37.799 72.8,37.163 73.963,36 80.92,36 J3.6
AIN4: J3.7 R11.1 | length 27.3
  Top Layer w0.3: R11.1 68.414,31 68.895,30.519 68.895,30.506 69.401,30 70.764,30 71.189,29.575 72.811,29.575 73.236,30 81.006,30 82.551,31.545 83.079,31.545 84.085,32.551 84.085,33.449 84.535,33.899 84.535,38.736 84.085,39.186 84.085,39.535 J3.7
CAN_RX: U3.32 U4.4 | length 8.4
  Top Layer w0.3: U4.4 30.325,44.905 30.67,45.25 34.356,45.25 34.445,45.339 35.555,45.339 35.644,45.25 U3.32
CAN_TX: U3.33 U4.1 | length 13.4
  Top Layer w0.254: U4.1 29.325,41.095 28.723,41.697 28.723,44.046 28.98,44.303 30.736,44.303 31.183,44.75 34.46,44.75 34.622,44.912 35.378,44.912 35.54,44.75 U3.33
CANH: D4.1 J2.1 JP2.1 TP5.1 U4.7 | length 43.3
  Top Layer w0.254: J2.1 9.341,43.95 D4.1 13.95,43.95 13.273,43.273 13.273,35.225 15,33.498 TP5.1 ; 13.273,41.535 13.435,41.373 16.186,41.373 17.6,42.787 17.6,43.226 17.834,43.46 JP2.1 20.095,42.365 U4.7
CANL: D4.2 J2.2 R4.1 TP6.1 U4.6 | length 61.5
  Top Layer w0.254: J2.2 9.932,38.279 9.932,28.191 14.45,23.673 19.673,23.673 TP6.1 ; 7.211,41 v1(12,41) ; v1(12,46.1) 12.15,46.1 R4.1@13.9,47.85 ; R4.1 R4.1@13.9,47.85 ; U4.6 23.675,43.635 22.788,44.522 18.1,44.522 17.196,43.618 17.196,42.954 16.292,42.05 D4.2 14,42.72 14.357,43.078 14.37,43.078 14.727,43.435 14.727,45.068 13.9,45.895 R4.1@13.9,47.85
  Bottom Layer w0.254: v1(12,41) v1(12,46.1)
DIGITAL_IN1: R13.2 R14.2 U3.21 | length 20
  Top Layer w0.3: U3.21 40.75,51.761 40.9,51.911 40.9,52.892 v1(41.004,52.996) ; v1(51.776,53) 51.978,53 53.776,54.798 R14.2 R13.2
  Bottom Layer w0.3: v1(41.004,52.996) 41.006,52.998 51.774,52.998 v1(51.776,53)
DIGITAL_IN2: R15.2 R16.2 U3.22 | length 24.3
  Top Layer w0.3: v1(40,54) 40,51.162 40.225,50.937 40.225,50.05 U3.22 ; v1(50,54) 50,52.978 53.776,49.202 R16.2 56.125,49 56.975,48.15 R15.2
  Bottom Layer w0.3: v1(40,54) v1(50,54)
DIN1: J3.8 R13.1 | length 33.4
  Top Layer w0.3: R13.1 74.5,55 77.5,52 79,52 80.878,50.122 80.878,48.827 82.551,47.155 83.079,47.155 84.085,46.149 84.085,45.251 83.449,44.615 82.991,44.615 82.771,44.395 82.771,43.389 J3.8
DIN2: J3.9 R15.1 | length 26.2
  Top Layer w0.3: R15.1 59.025,48.15 59.5,48.625 65.541,48.625 66.341,49.425 79.275,49.425 J3.9
FREQ_IN: J3.10 R17.1 | length 83.7
  Top Layer w0.3: R17.1 46.05,55.15 43.2,58 40.176,58 40,58.176 40,60.824 40.176,61 42.824,61 43,61.176 43,64 45,66 89.4,66 89.4,65.662 89,65.262 89,58 85,54 85,50.24 J3.10
FREQ_TIMER_IN: C18.1 R17.2 R18.2 U3.29 | length 27.4
  Top Layer w0.3: R18.2 33.224,55.798 34.022,55 ; C18.1 C18.1@34.825,47.95 ; U3.29 36.025,46.75 C18.1@34.825,47.95 ; R17.2 34.022,55 ; 34.022,55 34.825,54.197 34.825,51.474 32.2,48.849 32.2,47.151 32.376,46.975 33.974,46.975 34.15,47.151 34.15,47.275 C18.1@34.825,47.95
GND: C1.1 C2.2 C3.1 C4.1 C5.2 C6.2 C7.2 C8.2 C9.1 C10.1 C11.1 C12.1 C13.1 C14.2 C15.2 C16.2 C17.2 C18.2 D2.2 D3.2 D4.3 D5.1 D6.1 D7.1 J1.2 J2.3 J3.3 J4.5 R3.2 R6.1 R8.1 R10.1 R12.1 R14.1 R16.1 R18.1 R22.1 SW1.1_2+ SW1.2_2+ TP4.1 TP7.1 U1.2 U2.3 U2.6 U2.7 U3.8 U3.23 U3.35 U3.47 U4.2 U4.8 | length 83.2
  Top Layer w0.3: TP4.1 18,14.68 J1.2 ; v1(26,49) C13.1 ; v1(29.825,42.205) U4.2 ; v1(32,54) 32,54.262 32.471,54.733 32.471,56.779 32.647,56.955 34.023,56.955 34.776,56.202 R18.1 ; C18.2 33.175,48.05 33.85,48.725 33.85,48.849 35.001,50 v1(37,50) 38.1,51.1 39.426,51.1 39.725,50.801 39.725,50.05 U3.23 ; v1(35,42) 36.75,43.75 U3.35 ; v1(39,61) 39.186,61.186 39.186,62.036 40.05,62.9 D5.1 ; U3.47 44.275,41.95 44.275,41.199 44.574,40.9 45.9,40.9 v1(46,41) ; v1(48,30) 49,31 C12.1 ; U2.7 U2.6 ; C3.1 50.915,13.885 v1(50.915,11.509) ; SW1.1_2+ SW1.2_2+ 55.27,23.84 SW1.2_2+@55.755,23.355 ; C4.1 57,13.9 v1(57,12) ; R3.2 59.552,38.202 60.814,39.464 60.814,39.814 v1(61,40) ; C10.1 60,25.925 v1(60,24) 61,23 v1(61,21) ; v1(65,17) 65.085,16.915 66.085,16.915 66.6,16.4 66.7,16.4 67,16.1 D7.1 ; v1(70,35) 70.236,35 71.65,36.414 71.65,36.65 R10.1 v1(72,34) R12.1 ; v1(71,17) 71.085,16.915 72.085,16.915 72.6,16.4 72.7,16.4 73,16.1 D6.1 ; R8.1 72,42.825 73.825,41 v1(74,41) ; R6.1 72,47 v1(73,46) ; C17.2 78,31 v1(79,32) ; C16.2 78,37 v1(79,38)
  Bottom Layer w0.3: v1(29.825,42.205) 29.928,42.102 34.898,42.102 v1(35,42)
LED_CAN: R20.1 U3.45 | length 42.5
  Top Layer w0.3: U3.45 43.225,41.95 43.225,41.064 43.125,40.964 43.125,40.963 42.882,40.72 42.882,39.947 43.419,39.41 43.582,39.41 45.342,37.65 45.506,37.65 45.706,37.45 v1(47.55,37.45) ; v1(54,40) 58.623,40 58.799,39.824 58.799,37.221 61,35.02 61,33.562 69.937,24.625 71.5,24.625 71.975,24.15 R20.1
  Bottom Layer w0.3: v1(47.55,37.45) 51.45,37.45 v1(54,40)
LED_ERROR: R21.1 U3.46 | length 33.8
  Top Layer w0.3: U3.46 43.775,41.95 43.775,40.377 v1(43.817,40.334) ; v1(56,37) 56,33.466 61.378,28.088 62.012,28.088 65.95,24.15 R21.1
  Bottom Layer w0.3: v1(43.817,40.334) 43.797,40.314 43.797,39.203 46,37 46.678,37 47.163,36.515 47.937,36.515 48.422,37 v1(56,37)
LED_STATUS: R19.1 U3.18 | length 25.2
  Top Layer w0.3: R19.1 35.475,62.525 35.475,61.525 v1(41,56) ; U3.18 42.275,50.05 42.275,50.801 43.288,51.814 43.814,51.814 v1(44,52)
  Bottom Layer w0.3: v1(41,56) 40.101,55.101 39.779,55.101 37,52.322 37.322,52 v1(44,52)
NetD3_1: D3.1 R1.2 | length 6
  Top Layer w0.3: D3.1 62.05,9.9 R1.2
NetD5_2: D5.2 R19.2 | length 5.9
  Top Layer w0.3: R19.2 38.626,63 39.476,63.85 40.624,63.85 40.8,63.674 40.8,63.25 41.05,63 D5.2
NetD6_2: D6.2 R20.2 | length 8.4
  Top Layer w0.3: R20.2 74.025,16.975 74.9,16.1 D6.2
NetD7_2: D7.2 R21.2 | length 8.4
  Top Layer w0.3: R21.2 68,17 68.9,16.1 D7.2
NetJP1_2: JP1.2 R3.1 U3.44 | length 30.4
  Top Layer w0.3: U3.44 42.725,41.95 42.725,41.201 42.675,41.151 42.675,41.149 42.432,40.906 42.432,39.761 44.993,37.2 45.319,37.2 45.519,37 46.326,37 46.811,36.515 47.937,36.515 48.485,37.063 48.485,38.158 48,38.643 v1(48,40) ; v1(53,42) 53,39.678 54.678,38 R3.1 58,36 JP1.2
  Bottom Layer w0.3: v1(48,40) 50,42 v1(53,42)
NetJP2_2: JP2.2 R4.2 | length 3.8
  Top Layer w0.3: R4.2 17,48 JP2.2
NRST: C10.2 J4.4 R2.1 SW1.1_1- SW1.2_1- TP10.1 U3.7 | length 87.3
  Top Layer w0.3: J4.4 26.62,59.62 v1(27,60) ; U3.7 50.386,46.25 51.636,45 ; v1(54,45) 51.636,45 ; C10.2 61.026,26 60.85,26.176 60.85,26.824 60.674,27 59.476,27 58.935,26.459 58.935,22.613 58.387,22.065 56.869,22.065 56.029,22.905 54.511,22.905 54.061,23.355 53.215,23.355 52.73,23.84 SW1.2_1- SW1.1_1- 52.73,28.16 52.224,28.666 R2.1 52.224,41.454 52.065,41.613 52.065,42.387 52.224,42.546 52.224,44.412 51.636,45
  Bottom Layer w0.3: v1(27,60) TP10.1 47,59.675 47.898,58.777 47.898,56.457 49.42,54.935 51.163,54.935 54,52.098 v1(54,45)
OSC_IN: C11.2 U3.5 Y1.1 | length 42.9
  Top Layer w0.2: Y1.1 44,26 40.907,29.093 40.633,29.093 38.49,31.236 38.49,32.004 38.686,32.2 38.84,32.2 39,32.36 39,34.148 39.45,34.598 39.45,35.939 40.311,36.8 45.154,36.8 45.565,36.389 45.611,36.389 48,34 49.883,34 50.6,34.717 50.6,37.783 50.45,37.933 50.45,38.186 50.186,38.45 49.933,38.45 49.633,38.75 49.75,38.867 49.75,39.114 50.45,39.814 50.45,44.433 49.633,45.25 U3.5
OSC_OUT: C12.2 U3.6 Y1.2 | length 24.5
  Top Layer w0.3: Y1.2 47.684,33.75 47.834,33.6 48.16,33.6 48.87,32.89 48.89,32.89 C12.2@49,32.78 ; U3.6 50.25,45.75 51,45 51,33.44 49.68,33.44 49.13,32.89 49.11,32.89 C12.2@49,32.78 ; C12.2 C12.2@49,32.78
SWCLK: J4.3 TP9.1 U3.37 | length 83.4
  Top Layer w0.3: v1(21,47) 18,50 18,57.68 23.555,63.235 29.765,63.235 30,63 30,58 29.5,57.5 27.5,57.5 27.08,57.08 J4.3 ; v1(39,39) 39,39.262 39.25,39.512 U3.37
  Bottom Layer w0.3: TP9.1 18,55 21.92,55 J4.3 ; v1(21,47) 21,38.176 21.176,38 30,38 31,39 v1(39,39)
SWDIO: J4.2 TP8.1 U3.34 | length 23.8
  Top Layer w0.3: J4.2 27.54,54.54 TP8.1 ; v1(35,44) 35.262,44 35.512,44.25 U3.34
  Bottom Layer w0.3: TP8.1 31.065,53.935 31.065,53.613 34,50.678 34,44 v1(35,44)
USER_BUTTON: R22.2 SW2.1_2+ SW2.2_2+ TP11.1 U3.19 | length 50.8
  Top Layer w0.3: U3.19 41.775,50.05 41.775,51.097 43.613,52.935 44.387,52.935 44.859,52.463 45.338,52.463 48.814,55.94 48.814,56.814 v1(48.839,56.839) ; v1(52,60) 52.202,60 54,61.798 R22.2 54,62.202 55.988,64.19 62.759,64.19 63.107,63.842 63.107,63.348 63.455,63 SW2.1_2+ SW2.2_2+ 64.54,58.935 65.025,58.45 65.28,58.45 66.73,57 v1(70,57)
  Bottom Layer w0.3: v1(48.839,56.839) v1(52,60) ; v1(70,57) 73,60 TP11.1
VIN_12V: C1.2 D1.2 J2.4 TP1.1 U1.1 | length 64.6
  Top Layer w0.4: J2.4 5.386,32.665 5.386,32.063 14.253,23.196 14.784,23.196 20.98,17 TP1.1 28.375,19.375 32.995,19.375 33.2,19.17 33.2,12.83 32.675,12.305 D1.2@32.675,9.425 ; C1.2 36.55,13.45 36.55,13.3 D1.2@32.675,9.425 ; U1.1 35.285,7.175 32.675,7.175 32,7.85 D1.2 ; D1.2 32.675,8.975 D1.2@32.675,9.425 ; D1.2 32,8.75 D1.2@32.675,9.425
VIN_FUSED: D1.1 D2.1 F1.2 | length 18.8
  Top Layer w0.4: F1.2 27.685,8.615 31.175,5.125 31.325,5.125 32,4.45 D1.1 32,5.925 31.547,6.378 31.228,6.378 30.775,6.83 30.775,12.6 32,13.825 D2.1
VIN_RAW: F1.1 J1.1 | length 15.2
  Top Layer w0.4: J1.1 17.56,12.14 26.315,3.385 F1.1
pads on no net: J2. U2.4 U3.2 U3.3 U3.4 U3.14 U3.15 U3.16 U3.17 U3.20 U3.25 U3.26 U3.27 U3.28 U3.30 U3.31 U3.38 U3.39 U3.40 U3.41 U3.42 U3.43 U4.5

## Polygon pours and split planes (outlines as drawn)
GND on Top Layer "GND_L01_P012" (solid, pour order 12): 0,67 90,67 90,0 0,0
GND on Bottom Layer "GND_L02_P010" (solid, pour order 10): 0,67 90,67 90,0 0,0

## Silkscreen, mask and mechanical layers (free items; w line width, h text height)
Top Overlay:
  text "SWD" at 19.15,65.15 h1
  text "GND" at 20.1,62.1 h0.8
  text "RST" at 20.1,59.1 h0.8
  text "CLK" at 20.1,57.1 h0.8
  text "SENSOR/" at 78.15,54.15 h1
  text "DIO" at 20.1,54.1 h0.8
  text "IO" at 80.15,52.15 h1
  text "1" at 26.15,51.15 h1
  text "3V3" at 20.1,51.1 h0.8
  text "CANH" at 3.15,50.15 h1
  text "1" at 2.15,48.15 h1
  text "CANL" at 3.15,45.15 h1
  text "GND" at 3.15,40.15 h1
  text "VIN" at 3.15,35.15 h1
  text "GND" at 85.1,30.1 h0.5
  text "3V3" at 85.1,27.1 h0.5
  text "1" at 80.15,25.15 h1
  text "5V" at 85.1,24.1 h0.5
  text "J3 SENSOR PINOUT" at 1.1,23.1 h0.5
  text "4-7=AIN1-AIN4" at 1,22 h0.5
  text "8-9=DIN1-DIN2" at 1.1,21.1 h0.5
  text "10=FREQ" at 1.1,20.1 h0.5
  text "VIN" at 14.15,15.15 h1
  text "GND" at 19.15,15.15 h1
  text "1" at 15.15,9.15 h1
  text "TP1 =12V  / TP2 =5V / TP3 =3V3 / TP4 =GND / TP5 =CANH / TP6 =CANL / TP7 =GND / TP8 =SWDIO / TP9 =SWCLK / TP10=NRST / TP11=USER" at 1,9 h0.6
  text "STM32 CAN TELEMETRY NODE / REV A / Joshua Nwaneli / 2026" at 81,9 h0.7